# Altium PCB 00.Main.PcbDoc (part 2 of 5)
Units mm, origin at the board's own origin, x right, y up, seen from the top; angles counter-clockwise.
Board outline 300 x 165 mm, 2 copper layers (Top Layer, Bottom Layer); 76 components, 103 nets, 576 pads, 97 vias.
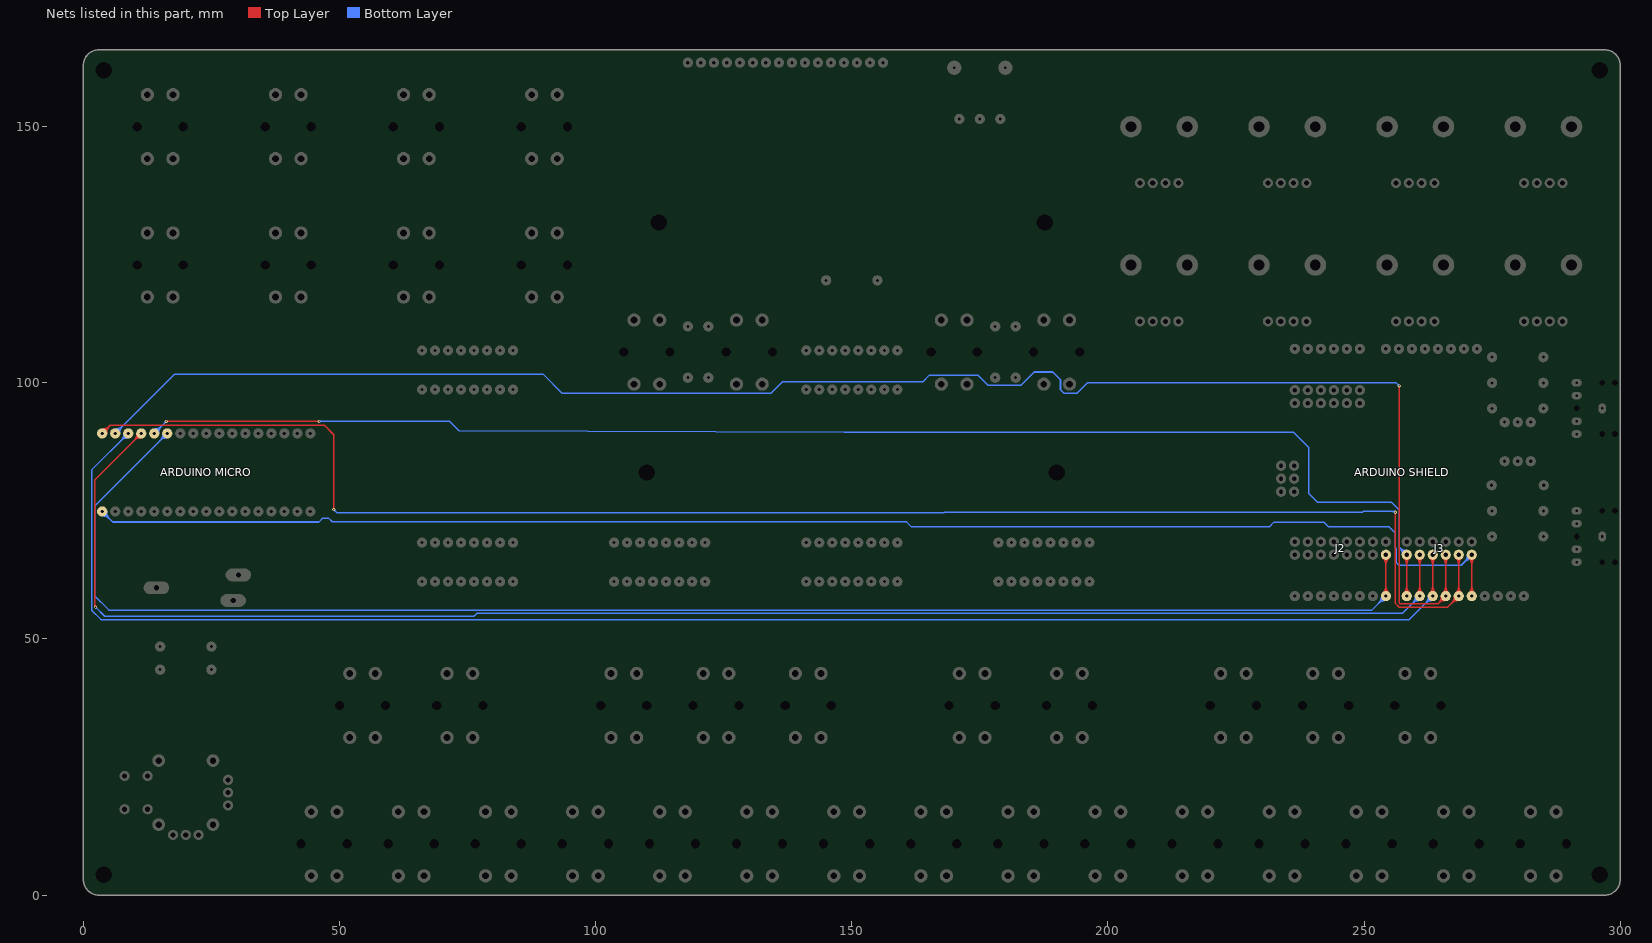
[diagram p2: the nets of this part, all layers, seen from the top]

## Via types
v1: diameter 0.6, hole 0.3, Top Layer to Bottom Layer, 97 vias

## Nets (pads, with @x,y where several pads share a name; then routed paths per layer and width w, separated by ;. In a path a pad name is that pad's centre, name@x,y a point inside that pad or via, vN(x,y) a via of type N, cw(c..) or ccw(c..) an arc to the next point about the centre after c; other vN are vias at no path point) (continued)
D7: "ARDUINO MICRO.29" "ARDUINO SHIELD.22" J2.15 | length 321.2
  Top Layer w0.3: 253.667,58.971 ccw(c252.216,60.422) 254.268,60.422 ccw(c256.32,60.422) 254.869,58.971 ; J2.15@253.667,65.829 cw(c252.216,64.378) 254.268,64.378 cw(c256.32,64.378) J2.15@254.869,65.829 ; 253.879,58.759 ccw(c252.94,59.698) 254.268,59.698 ccw(c255.596,59.698) 254.657,58.759 ; J2.15@253.879,66.041 cw(c252.94,65.102) 254.268,65.102 cw(c255.596,65.102) J2.15@254.657,66.041 ; 254.268,58.37 J2.15@254.268,66.43
  Bottom Layer w0.3: 15.53,90.12 cw(c13.478,90.12) 14.929,88.669 cw(c16.38,87.218) 16.38,89.27 ; 15.83,90.12 cw(c14.502,90.12) 15.441,89.181 cw(c16.38,88.242) 16.38,89.57 ; 16.38,90.12 2.221,75.961 2.221,58.406 4.989,55.637 251.535,55.637 254.268,58.37 ; 253.418,58.37 cw(c251.366,58.37) 252.817,56.919 cw(c254.268,55.468) 254.268,57.52 ; 253.718,58.37 cw(c252.39,58.37) 253.329,57.431 cw(c254.268,56.492) 254.268,57.82
D8: "ARDUINO MICRO.30" "ARDUINO SHIELD.23" J3.1 | length 297.2
  Top Layer w0.3: v1(16.187,92.467) v1(46.036,92.467) ; v1@16.294,92.361 cw(c16.55,92.105) 16.55,92.467 cw(c16.55,92.83) v1@16.294,92.573 ; v1@45.93,92.361 ccw(c45.674,92.105) 45.674,92.467 ccw(c45.674,92.83) v1@45.93,92.573 ; 257.731,58.971 ccw(c256.28,60.422) 258.332,60.422 ccw(c260.384,60.422) 258.933,58.971 ; J3.1@257.731,65.829 cw(c256.28,64.378) 258.332,64.378 cw(c260.384,64.378) J3.1@258.933,65.829 ; 257.943,58.759 ccw(c257.004,59.698) 258.332,59.698 ccw(c259.66,59.698) 258.721,58.759 ; J3.1@257.943,66.041 cw(c257.004,65.102) 258.332,65.102 cw(c259.66,65.102) J3.1@258.721,66.041 ; 258.332,58.37 J3.1@258.332,66.43
  Bottom Layer w0.3: 13.84,90.12 v1(16.187,92.467) ; 13.84,90.67 ccw(c13.84,91.998) 14.779,91.059 ccw(c15.718,90.12) 14.39,90.12 ; 13.84,90.97 ccw(c13.84,93.022) 15.291,91.571 ccw(c16.742,90.12) 14.69,90.12 ; v1@16.037,92.467 cw(c15.675,92.467) 15.931,92.211 cw(c16.187,91.955) v1@16.187,92.317 ; v1(46.036,92.467) 71.537,92.467 73.392,90.613 148.574,90.338 236.253,90.338 239.203,87.387 239.203,78.396 240.93,76.669 255.383,76.669 256.881,75.17 256.881,67.881 ; v1@46.142,92.361 cw(c46.398,92.105) 46.398,92.467 cw(c46.398,92.83) v1@46.142,92.573 ; J3.1@257.482,66.43 ccw(c255.431,66.43) 256.881,67.881 ; J3.1@257.782,66.43 ccw(c256.455,66.43) 257.393,67.369 ccw(c258.332,68.307) J3.1@258.332,66.98 ; J3.1@258.332,66.43 256.881,67.881 ; J3.1@258.332,67.28 cw(c258.332,69.331) 256.881,67.881
D9: "ARDUINO MICRO.31" "ARDUINO SHIELD.24" J3.3 | length 329.2
  Top Layer w0.3: 2.221,56.952 ccw(c3.103,56.952) v1@2.479,56.328 ; v1(2.373,56.222) 2.221,56.374 2.221,81.041 11.3,90.12 ; 10.45,90.12 cw(c8.398,90.12) 9.849,88.669 cw(c11.3,87.218) 11.3,89.27 ; 10.75,90.12 cw(c9.422,90.12) 10.361,89.181 cw(c11.3,88.242) 11.3,89.57 ; 260.271,58.971 ccw(c258.82,60.422) 260.872,60.422 ccw(c262.924,60.422) 261.473,58.971 ; J3.3@260.271,65.829 cw(c258.82,64.378) 260.872,64.378 cw(c262.924,64.378) J3.3@261.473,65.829 ; 260.483,58.759 ccw(c259.544,59.698) 260.872,59.698 ccw(c262.2,59.698) 261.261,58.759 ; J3.3@260.483,66.041 cw(c259.544,65.102) 260.872,65.102 cw(c262.2,65.102) J3.3@261.261,66.041 ; 260.872,58.37 J3.3@260.872,66.43
  Bottom Layer w0.3: v1@2.373,56.072 cw(c2.373,55.709) 2.629,55.966 cw(c2.885,56.222) v1@2.523,56.222 ; v1(2.373,56.222) 4.177,54.418 76.236,54.418 76.821,55.002 257.504,55.002 260.872,58.37 ; 260.022,58.37 cw(c257.97,58.37) 259.421,56.919 cw(c260.872,55.468) 260.872,57.52 ; 260.322,58.37 cw(c258.994,58.37) 259.933,57.431 cw(c260.872,56.492) 260.872,57.82
D10: "ARDUINO MICRO.32" "ARDUINO SHIELD.25" J3.5 | length 331.2
  Top Layer w0.3: 262.811,58.971 ccw(c261.36,60.422) 263.412,60.422 ccw(c265.464,60.422) 264.013,58.971 ; J3.5@262.811,65.829 cw(c261.36,64.378) 263.412,64.378 cw(c265.464,64.378) J3.5@264.013,65.829 ; 263.023,58.759 ccw(c262.084,59.698) 263.412,59.698 ccw(c264.74,59.698) 263.801,58.759 ; J3.5@263.023,66.041 cw(c262.084,65.102) 263.412,65.102 cw(c264.74,65.102) J3.5@263.801,66.041 ; 263.412,58.37 J3.5@263.412,66.43
  Bottom Layer w0.3: 7.91,90.12 cw(c5.858,90.12) 7.309,88.669 cw(c8.76,87.218) 8.76,89.27 ; 8.21,90.12 cw(c6.882,90.12) 7.821,89.181 cw(c8.76,88.242) 8.76,89.57 ; 8.76,90.12 1.611,82.971 1.611,55.612 3.44,53.783 258.825,53.783 263.412,58.37 ; 262.562,58.37 cw(c260.51,58.37) 261.961,56.919 cw(c263.412,55.468) 263.412,57.52 ; 262.862,58.37 cw(c261.534,58.37) 262.473,57.431 cw(c263.412,56.492) 263.412,57.82
D11: "ARDUINO MICRO.33" "ARDUINO SHIELD.26" J3.7 | length 346.8
  Top Layer w0.3: v1@256.775,99.296 cw(c256.519,99.039) 256.881,99.039 cw(c257.243,99.039) v1@256.987,99.296 ; v1(256.881,99.402) 256.881,57.034 257.008,56.907 264.489,56.907 265.952,58.37 J3.7@265.952,66.43 ; 265.102,58.37 cw(c263.05,58.37) 264.501,56.919 cw(c265.952,55.468) 265.952,57.52 ; 265.351,58.971 ccw(c263.9,60.422) 265.952,60.422 ccw(c268.004,60.422) 266.553,58.971 ; J3.7@265.351,65.829 cw(c263.9,64.378) 265.952,64.378 cw(c268.004,64.378) J3.7@266.553,65.829 ; 265.402,58.37 cw(c264.074,58.37) 265.013,57.431 cw(c265.952,56.492) 265.952,57.82 ; 265.563,58.759 ccw(c264.624,59.698) 265.952,59.698 ccw(c267.28,59.698) 266.341,58.759 ; J3.7@265.563,66.041 cw(c264.624,65.102) 265.952,65.102 cw(c267.28,65.102) J3.7@266.341,66.041
  Bottom Layer w0.3: 6.22,90.12 17.737,101.637 89.8,101.637 93.458,97.979 134.25,97.979 136.434,100.164 163.841,100.164 165.187,101.51 174.581,101.51 176.541,99.55 183.065,99.55 185.625,102.11 189.251,102.11 190.75,100.61 190.75,98.65 191.4,98 194.02,98 196.057,100.037 256.246,100.037 v1(256.881,99.402) ; 6.22,90.67 ccw(c6.22,91.998) 7.159,91.059 ccw(c8.098,90.12) 6.77,90.12 ; 6.22,90.97 ccw(c6.22,93.022) 7.671,91.571 ccw(c9.122,90.12) 7.07,90.12 ; v1@256.731,99.402 ccw(c256.369,99.402) 256.625,99.658 ccw(c256.881,99.914) v1@256.881,99.552
D12: "ARDUINO MICRO.34" "ARDUINO SHIELD.27" J3.9 | length 332.1
  Top Layer w0.3: 3.68,90.12 5.265,91.705 47.052,91.705 48.881,89.877 v1(48.881,75.246) ; 3.68,90.67 ccw(c3.68,91.998) 4.619,91.059 ccw(c5.558,90.12) 4.23,90.12 ; 3.68,90.97 ccw(c3.68,93.022) 5.131,91.571 ccw(c6.582,90.12) 4.53,90.12 ; v1@48.775,75.352 ccw(c48.518,75.608) 48.881,75.608 ccw(c49.243,75.608) v1@48.987,75.352 ; v1@256.013,74.632 cw(c255.757,74.376) 256.119,74.376 cw(c256.481,74.376) v1@256.225,74.632 ; v1(256.119,74.738) 256.119,56.907 256.856,56.171 266.293,56.171 268.492,58.37 J3.9@268.492,66.43 ; 267.642,58.37 cw(c265.59,58.37) 267.041,56.919 cw(c268.492,55.468) 268.492,57.52 ; 267.891,58.971 ccw(c266.44,60.422) 268.492,60.422 ccw(c270.544,60.422) 269.093,58.971 ; J3.9@267.891,65.829 cw(c266.44,64.378) 268.492,64.378 cw(c270.544,64.378) J3.9@269.093,65.829 ; 267.942,58.37 cw(c266.614,58.37) 267.553,57.431 cw(c268.492,56.492) 268.492,57.82 ; 268.103,58.759 ccw(c267.164,59.698) 268.492,59.698 ccw(c269.82,59.698) 268.881,58.759 ; J3.9@268.103,66.041 cw(c267.164,65.102) 268.492,65.102 cw(c269.82,65.102) J3.9@268.881,66.041
  Bottom Layer w0.3: v1@48.881,75.096 cw(c48.881,74.734) 49.137,74.99 cw(c49.393,75.246) v1@49.031,75.246 ; v1(48.881,75.246) 49.516,74.611 168.015,74.611 168.142,74.738 249.717,74.738 249.883,74.904 255.953,74.904 v1(256.119,74.738) ; 255.357,74.904 cw(c255.357,73.976) v1@256.013,74.632
D13: "ARDUINO MICRO.1" "ARDUINO SHIELD.28" J3.11 | length 306.5
  Top Layer w0.3: 270.431,58.971 ccw(c268.98,60.422) 271.032,60.422 ccw(c273.084,60.422) 271.633,58.971 ; J3.11@270.431,65.829 cw(c268.98,64.378) 271.032,64.378 cw(c273.084,64.378) J3.11@271.633,65.829 ; 270.643,58.759 ccw(c269.704,59.698) 271.032,59.698 ccw(c272.36,59.698) 271.421,58.759 ; J3.11@270.643,66.041 cw(c269.704,65.102) 271.032,65.102 cw(c272.36,65.102) J3.11@271.421,66.041 ; 271.032,58.37 J3.11@271.032,66.43
  Bottom Layer w0.3: 3.68,74.03 cw(c3.68,71.978) 5.131,73.429 cw(c6.582,74.88) 4.53,74.88 ; 3.68,74.33 cw(c3.68,73.002) 4.619,73.941 cw(c5.558,74.88) 4.23,74.88 ; 3.68,74.88 5.73,72.83 45.976,72.83 46.729,73.583 47.879,73.583 48.588,72.874 105.83,72.874 105.872,72.833 160.691,72.833 161.657,71.868 231.494,71.868 232.446,72.82 242.149,72.82 243.101,71.868 254.9,71.868 256.132,70.636 256.132,67.817 256.318,67.631 256.318,64.867 256.805,64.38 268.982,64.38 J3.11@271.032,66.43 ; J3.11@270.182,66.43 cw(c268.13,66.43) 269.581,64.979 cw(c271.032,63.528) J3.11@271.032,65.58 ; J3.11@270.482,66.43 cw(c269.154,66.43) 270.093,65.491 cw(c271.032,64.552) J3.11@271.032,65.88